# Altium PCB 前板.PcbDoc
Units mil, origin at the board's own origin, x right, y up, seen from the top; angles counter-clockwise.
Board outline 2362.2 x 2362.2 mil, 4 copper layers (Top Layer, GND, PWR, Bottom Layer), stack 23.756 mil thick; 58 components, 58 nets, 327 pads, 79 vias.
Unrouted connection lines stored in the file: 2.
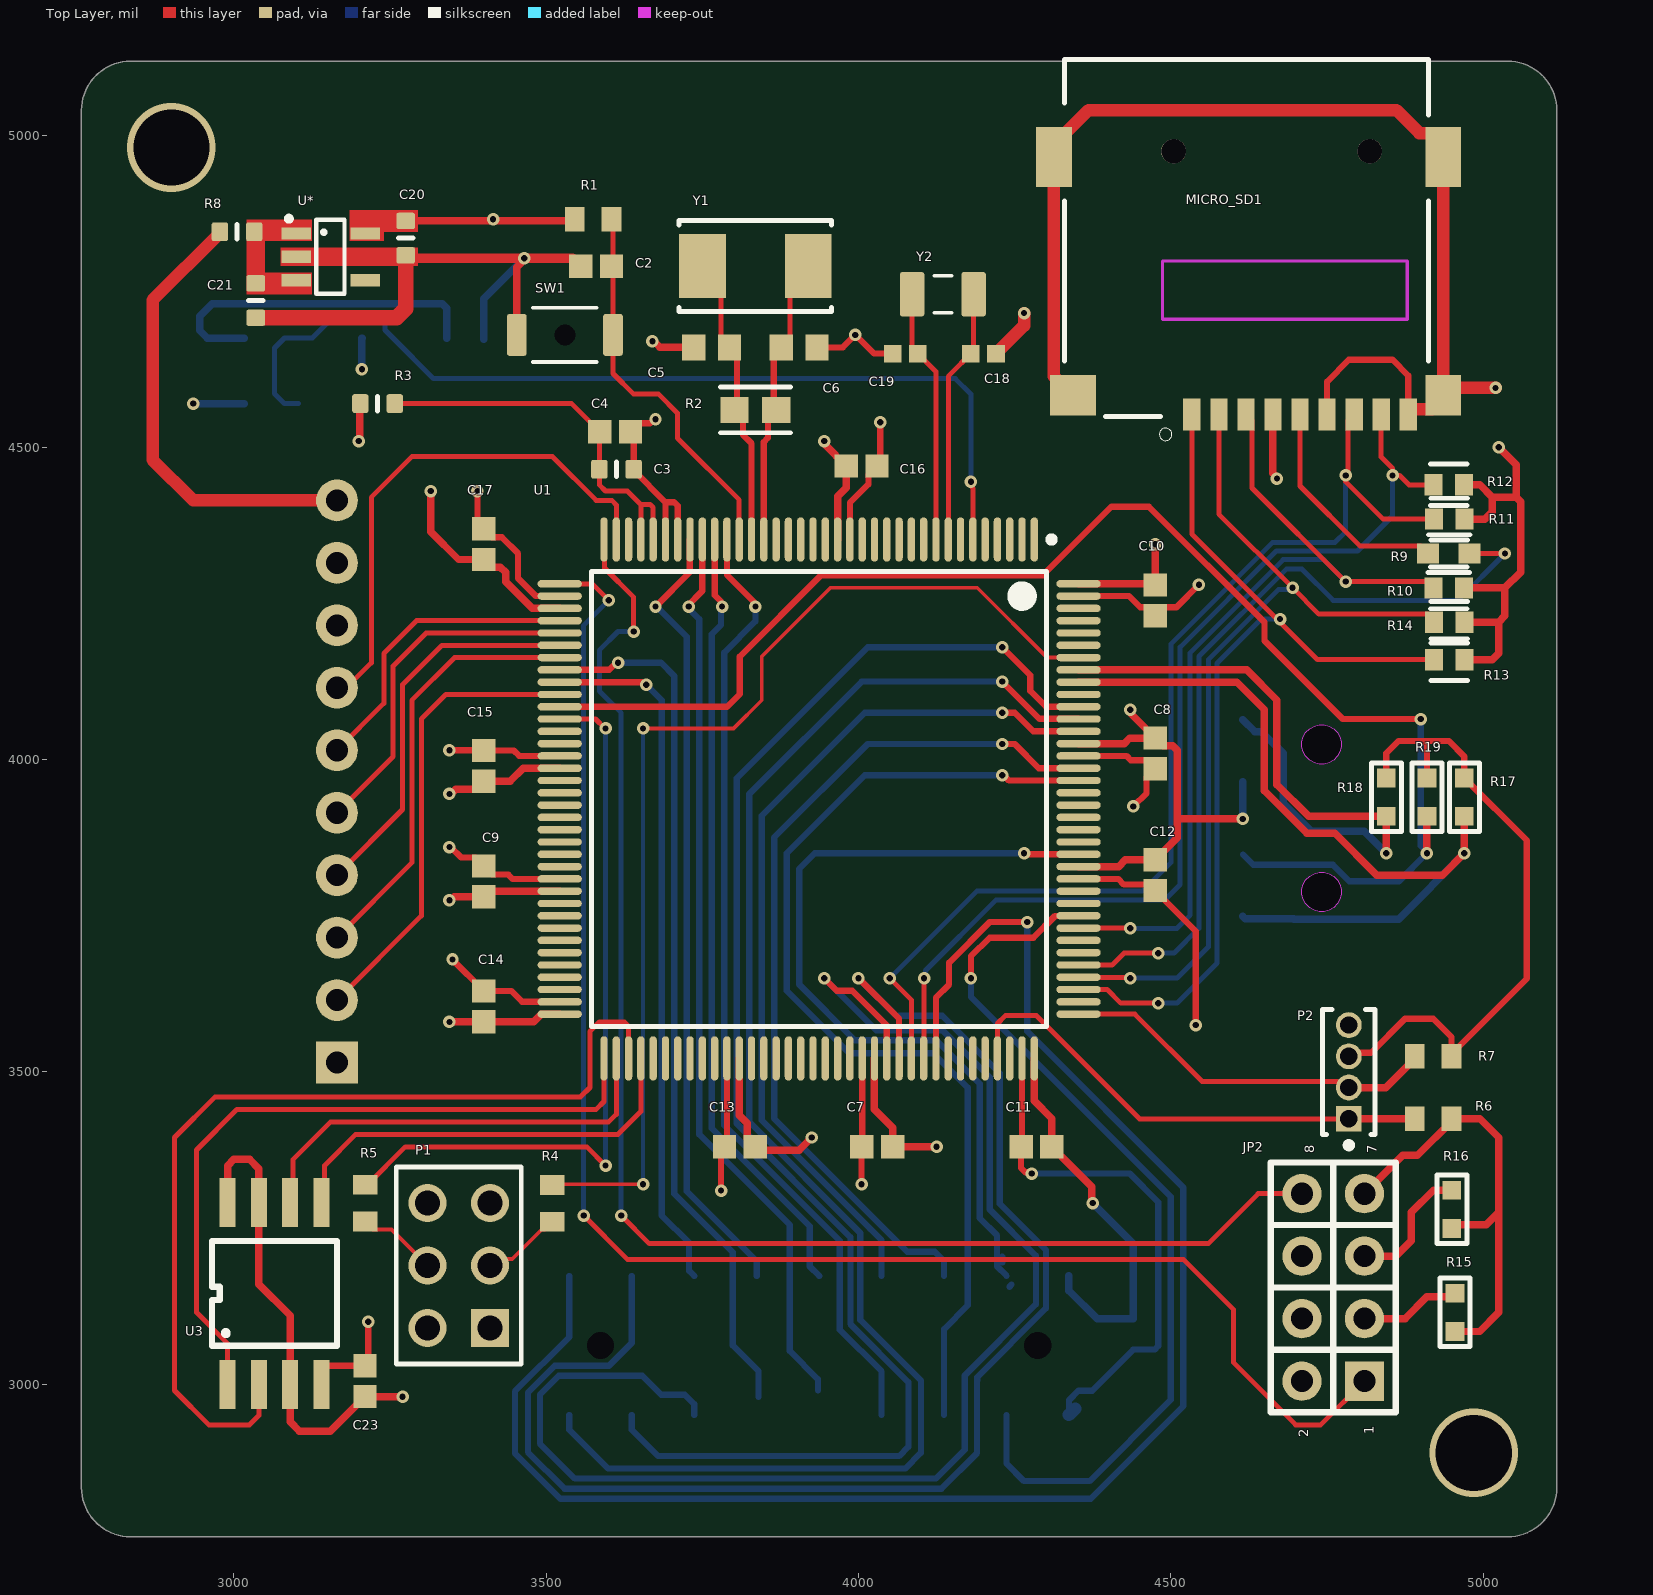
[diagram p0: Top Layer view]
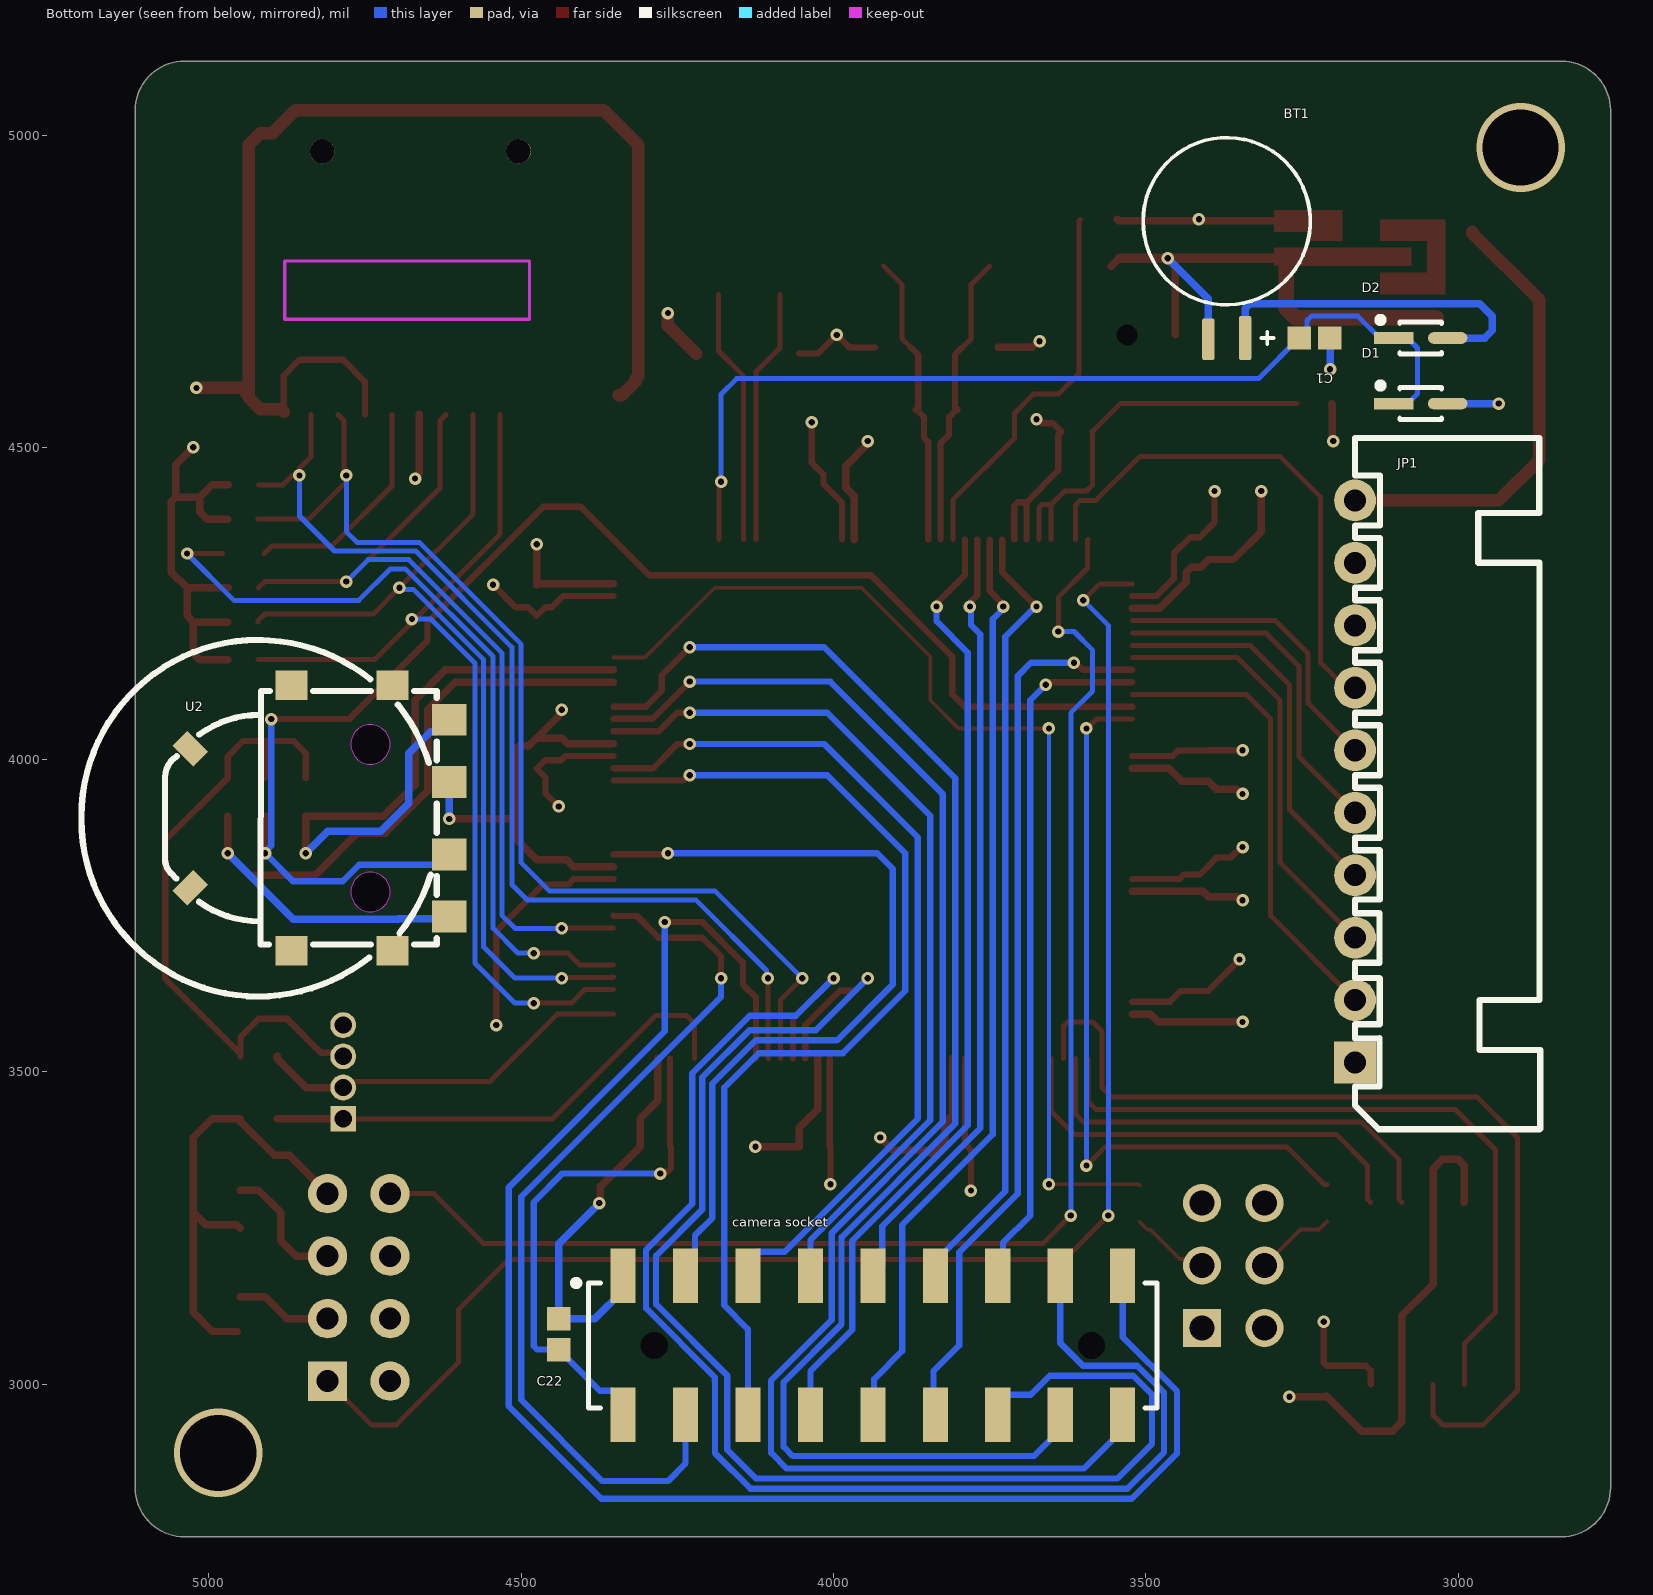
[diagram p1: Bottom Layer view, seen from below]
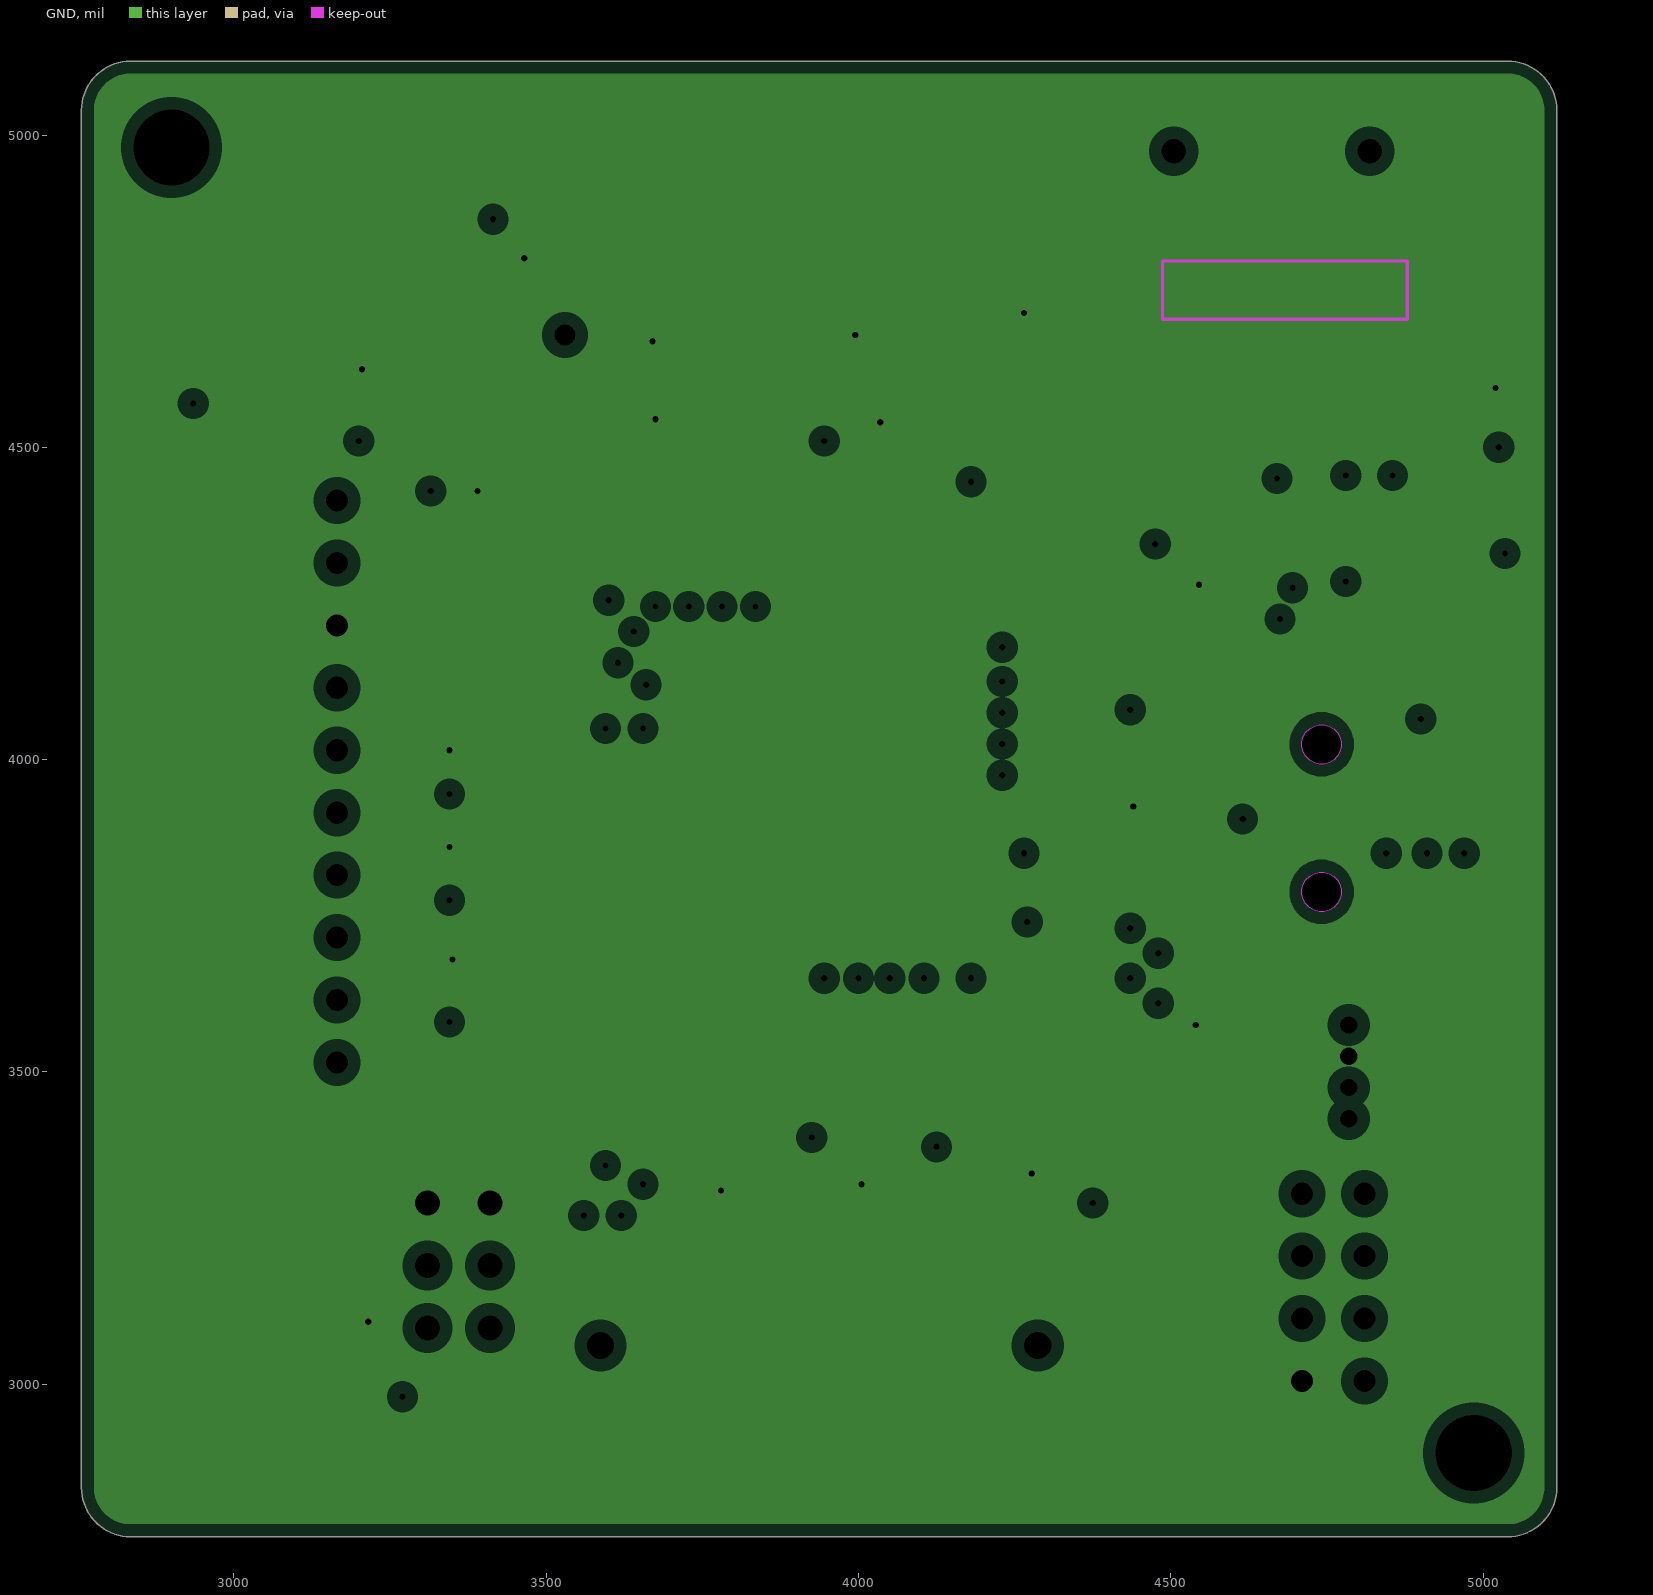
[diagram p2: GND, clearances drawn from the general rule]
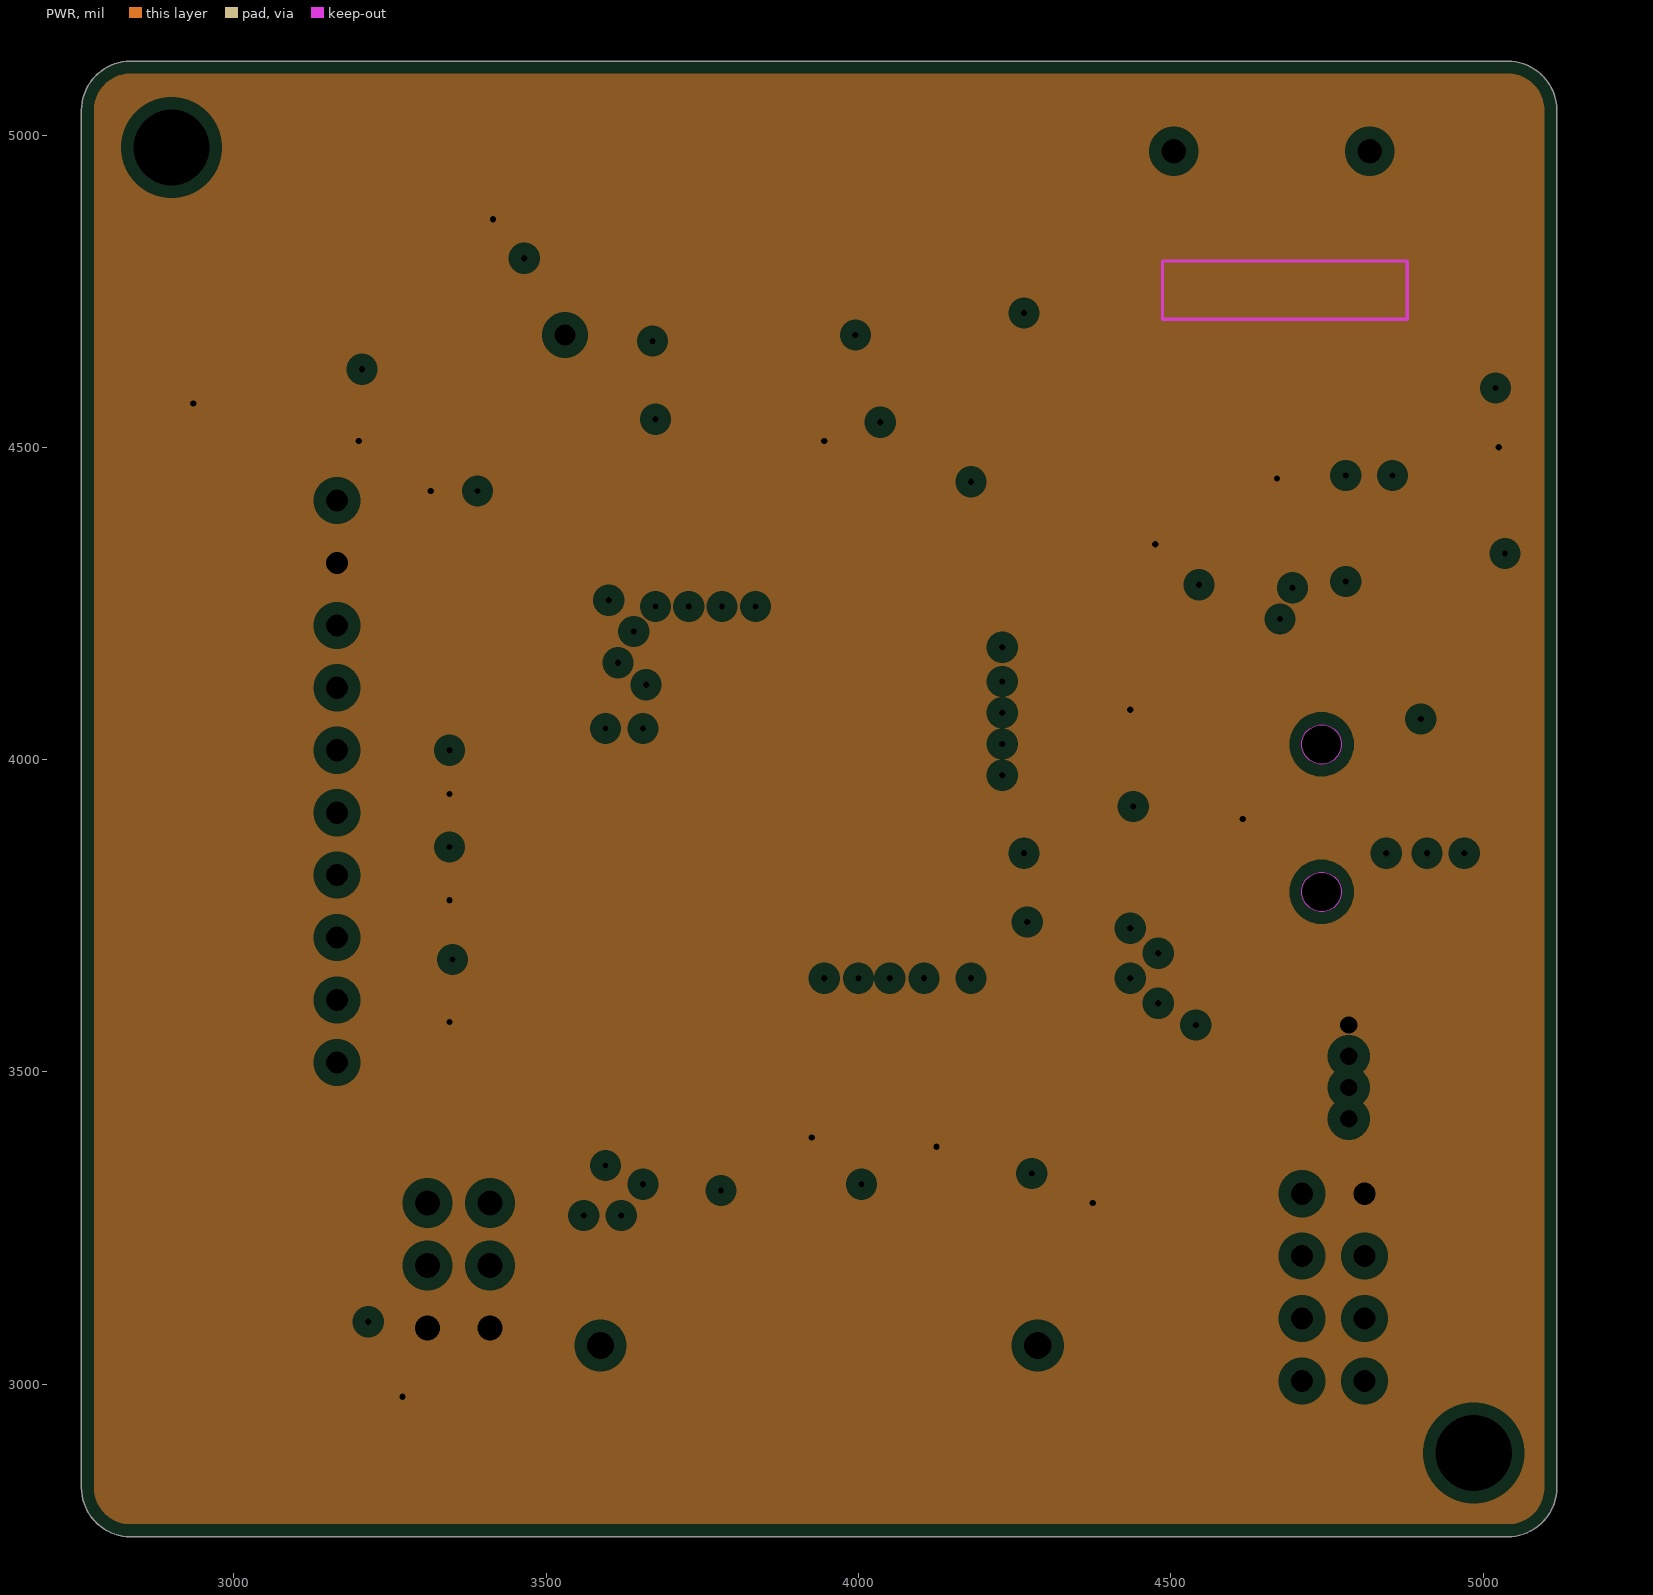
[diagram p3: PWR, clearances drawn from the general rule]

## Layer stack, top to bottom
Top Solder: solder mask 0.4, Solder Resist, Dk 3.5
Top Layer: signal copper 1.4
Dielectric 2: prepreg 2.8, PP-006, Dk 4.1
GND: plane copper 1.378, net GND
Dielectric 1: dielectric 12.6, FR-4, Dk 4.8
PWR: plane copper 1.378, net VCC
Dielectric 3: prepreg 2.8, PP-006, Dk 4.1
Bottom Layer: signal copper 1.4
Bottom Solder: solder mask 0.4, Solder Resist, Dk 3.5

## Board outline
2755.91,2834.65 2755.91,5039.37 cw(c2834.65,5039.37) 2834.65,5118.11 5039.37,5118.11 cw(c5039.37,5039.37) 5118.11,5039.37 5118.11,2834.65 cw(c5039.37,2834.65) 5039.37,2755.91 2834.65,2755.91 cw(c2834.65,2834.65)

## Design rules (kind name [scope] priority, off if disabled: settings)
Clearance Clearance_1 [InNetClass('pwr')] p1: gap=10 ignorepadtopadclearanceinfootprint=FALSE except(6: Arc-THPad Arc-Via Arc-Hole Track-THPad Track-Via Track-Hole SMDPad-SMDPad SMDPad-THPad SMDPad-Via SMDPad-Hole THPad-THPad THPad-Via THPad-Hole Via-Via Via-Hole Fill-Hole Poly-Hole Region-Hole Text-Hole)
Clearance [All] p2: gap=6 ignorepadtopadclearanceinfootprint=FALSE
DiffPairsRouting DiffPair_DiffPairsRouting [InDifferentialPair ('NewDifferentialPair2')] p1: maxlimit=10 minlimit=10 mostfreqgap=10 toplayer_minwidth=6 toplayer_maxwidth=15 toplayer_prefwidth=8 bottomlayer_minwidth=6 bottomlayer_maxwidth=15 bottomlayer_prefwidth=8 maxuncoupledlength=500
DiffPairsRouting DiffPair_DiffPairsRouting_1 [InDifferentialPair ('NewDifferentialPair1')] p2 off: maxlimit=10 minlimit=10 mostfreqgap=10 toplayer_minwidth=6 toplayer_maxwidth=15 toplayer_prefwidth=10 bottomlayer_minwidth=6 bottomlayer_maxwidth=15 bottomlayer_prefwidth=10 maxuncoupledlength=500
DiffPairsRouting [All] p3: maxlimit=10 minlimit=10 mostfreqgap=10 toplayer_minwidth=15 toplayer_maxwidth=15 toplayer_prefwidth=15 bottomlayer_minwidth=15 bottomlayer_maxwidth=15 bottomlayer_prefwidth=15 maxuncoupledlength=500
MatchedLengths DiffPair_MatchedLengths [InDifferentialPair ('NewDifferentialPair2')] p1: tolerance=1000 checknetsindiffpair=FALSE checkdiffpairvsdiffpair=TRUE checkxsignals=TRUE checkothers=TRUE
MatchedLengths DiffPair_MatchedLengths_1 [InDifferentialPair ('NewDifferentialPair1')] p2: tolerance=1000 checknetsindiffpair=FALSE checkdiffpairvsdiffpair=TRUE checkxsignals=TRUE checkothers=TRUE
PlaneClearance [All] p1: clearance=20
PlaneConnect [All] p1: planeconnectstyle=Relief reliefexpansion=20 reliefentries=4 reliefconductorwidth=10 reliefairgap=10
PolygonConnect [All] p1: connectstyle=Relief reliefconductorwidth=10 reliefentries=4 polygonreliefangle="90 Angle" airgapwidth=10
RoutingVias [All] p1: holewidth=10 width=20 viastyle="Through Hole" minholewidth=10 minwidth=20 maxholewidth=28 maxwidth=50
SolderMaskExpansion [All] p1: expansion=4 istentingtop=FALSE
Width pwr [InNetClass('pwr')] p1: maxlimit=50 minlimit=10 preferedwidth=25
Width [All] p2: maxlimit=500 minlimit=6 preferedwidth=15
27 further rules are at their usual default settings.

## Classes and differential pairs
pad class stm_pad: U1-1 U1-2 U1-3 U1-4 U1-5 U1-6 U1-7 U1-8 U1-9 U1-10 U1-11 U1-12 U1-13 U1-14 U1-15 U1-16 U1-17 U1-18 U1-19 U1-20 U1-21 U1-22 U1-23 U1-24 U1-25 U1-26 U1-27 U1-28 U1-29 U1-30 U1-31 U1-32 U1-33 U1-34 U1-35 U1-36 U1-37 U1-38 U1-39 U1-40 U1-41 U1-42 U1-43 U1-44 U1-45 U1-46 U1-47 U1-48 U1-49 U1-50 U1-51 U1-52 U1-53 U1-54 U1-55 U1-56 U1-57 U1-58 U1-59 U1-60 U1-61 U1-62 U1-63 U1-64 U1-65 U1-66 U1-67 U1-68 U1-69 U1-70 U1-71 U1-72 U1-73 U1-74 U1-75 U1-76 U1-77 U1-78 U1-79 U1-80 U1-81 U1-82 U1-83 U1-84 U1-85 U1-86 U1-87 U1-88 U1-89 U1-90 U1-91 U1-92 U1-93 U1-94 U1-95 U1-96 U1-97 U1-98 U1-99 U1-100 U1-101 U1-102 U1-103 U1-104 U1-105 U1-106 U1-107 U1-108 U1-109 U1-110 U1-111 U1-112 U1-113 U1-114 U1-115 U1-116 U1-117 U1-118 U1-119 U1-120 U1-121 U1-122 U1-123 U1-124 U1-125 U1-126 U1-127 U1-128 U1-129 U1-130 U1-131 U1-132 U1-133 U1-134 U1-135 U1-136 U1-137 U1-138 U1-139 U1-140 U1-141 U1-142 U1-143 U1-144

## Components (designator, comment, footprint, x,y, rotation, side; value= is the part's Value field where it differs from the comment)
BT1 "MS621FE-FL11E" SEIK-MS621FE-FL11E-2_V 3370.47,4862.01 r270 bottom
C1 "Capacitor 100 nF +/-10% 50 V 0603" CAPC1608X90X40NL10T20 3230,4675 r0 bottom value=100nF
C2 "Capacitor 100 nF +/-10% 50 V 0603" CAPC1608X90X40NL10T20 3580,4790 r0 top value=100nF
C3 "Capacitor 10µF +/-20% 10V 0603" CAPC0603(1608)100_L 3612.56,4465 r0 top value=10µF
C4 "Capacitor 100 nF +/-10% 50 V 0603" CAPC1608X90X40NL10T20 3610.39,4525 r0 top value=100nF
C5 "GRM1885C1H220JA01D" CAPC1608X90X35ML10T15 3765,4660 r0 top value=22pF
C6 "GRM1885C1H220JA01D" CAPC1608X90X35ML10T15 3905,4660 r180 top value=22pF
C7 "Capacitor 100 nF +/-10% 50 V 0603" CAPC1608X90X40NL10T20 4030,3380 r0 top value=100nF
C8 "Capacitor 100 nF +/-10% 50 V 0603" CAPC1608X90X40NL10T20 4475,4010 r90 top value=100nF
C9 "Capacitor 100 nF +/-10% 50 V 0603" CAPC1608X90X40NL10T20 3400,3805 r270 top value=100nF
C10 "Capacitor 100 nF +/-10% 50 V 0603" CAPC1608X90X40NL10T20 4475,4255 r90 top value=100nF
C11 "Capacitor 100 nF +/-10% 50 V 0603" CAPC1608X90X40NL10T20 4285,3380 r0 top value=100nF
C12 "Capacitor 100 nF +/-10% 50 V 0603" CAPC1608X90X40NL10T20 4475,3815 r90 top value=100nF
C13 "Capacitor 100 nF +/-10% 50 V 0603" CAPC1608X90X40NL10T20 3810,3380 r0 top value=100nF
C14 "Capacitor 100 nF +/-10% 50 V 0603" CAPC1608X90X40NL10T20 3400,3605 r270 top value=100nF
C15 "Capacitor 100 nF +/-10% 50 V 0603" CAPC1608X90X40NL10T20 3400,3990 r270 top value=100nF
C16 "Capacitor 100 nF +/-10% 50 V 0603" CAPC1608X90X40NL10T20 4005,4470 r180 top value=100nF
C17 "Capacitor 100 nF +/-10% 50 V 0603" CAPC1608X90X40NL10T20 3400,4345 r270 top value=100nF
C18 "Capacitor 10 pF +/- 5% 50 V 0402" CAPC1005X55X25ML05T05 4200,4650 r180 top value=10pF
C19 "Capacitor 10 pF +/- 5% 50 V 0402" CAPC1005X55X25ML05T05 4075,4650 r0 top value=10pF
C20 "Capacitor 10µF +/-20% 10V 0603" CAPC0603(1608)100_L 3275,4835 r90 top value=10µF
C21 "Capacitor 10µF +/-20% 10V 0603" CAPC0603(1608)100_L 3035,4735 r270 top value=10µF
C22 "Capacitor 100 nF +/-10% 50 V 0603" CAPC1608X90X40NL10T20 4440,3080 r270 bottom value=100nF
C23 "Capacitor 100 nF +/-10% 50 V 0603" CAPC1608X90X40NL10T20 3210,3005 r270 top value=100nF
"camera socket" "SSM-109-S-DV-A" SMTC-SSM-109-X-DV-A 3937.01,3062.13 r180 bottom
D1 "1N4148WS" FP-477AB-IPC_A 3060,4570 r180 bottom
D2 "1N4148WS" FP-477AB-IPC_A 3060,4675 r180 bottom
JP1 "10p" XH2.54-WI-10P 3165,3965 r90 bottom
JP2 "2.54排针排母 4X2" HDR2.54-LI-2x4P 4760,3155 r90 top
MICRO_SD1 "TF-01A" TF-01A 4621.49,4835.08 r180 top
P1 "TSW-103-08-T-D" SMTC-TSW-103-08-X-D 3410,3090 r90 top
P2 "GRPB041VWVN-RC" SLIN-GRPB041VWVN-RC_V 4785,3500 r90 top
R1 "Resistor 10k +/-1% 0603 100 mW" RESC1608X55X25ML10T15 3575,4865 r0 top value=10k
R2 "ERJ-3EKF1004V" FP-ERJ3EK-IPC_A 3835,4560 r0 top value=1M
R3 "ERJ3EKF10R0V" RESC0603(1608)_L 3230,4570 r180 top value=10
R4 "Resistor 10k +/-1% 0603 100 mW" RESC1608X55X25ML10T15 3510,3289.53 r270 top value=10k
R5 "Resistor 10k +/-1% 0603 100 mW" RESC1608X55X25ML10T15 3210,3290 r90 top value=10k
R6 "Resistor 10k +/-1% 0603 100 mW" RESC1608X55X25ML10T15 4920,3425 r0 top value=10k
R7 "Resistor 10k +/-1% 0603 100 mW" RESC1608X55X25ML10T15 4920,3525 r0 top value=10k
R8 "0R3J" RESC0603(1608)_L 3005,4845 r0 top value=0
R9 "RC0603JR-07100RL" FP-RC0603-0_55-MFG 4945,4330 r180 top value=100
R10 "CRCW060347K0FKEA" FP-CRCW0603-e3-IPC_C 4945,4275 r180 top value=47k
R11 "CRCW060347K0FKEA" FP-CRCW0603-e3-IPC_C 4945.77,4385 r180 top value=47k
R12 "CRCW060347K0FKEA" FP-CRCW0603-e3-IPC_C 4945,4440 r180 top value=47k
R13 "CRCW060347K0FKEA" FP-CRCW0603-e3-IPC_C 4945.77,4160 r180 top value=47k
R14 "CRCW060347K0FKEA" FP-CRCW0603-e3-IPC_C 4945.77,4220 r180 top value=47k
R15 "10k" "R 0603_L" 4955,3115 r90 top
R16 "10k" "R 0603_L" 4950,3280 r90 top
R17 "10k" "R 0603_L" 4970,3940 r270 top
R18 "10k" "R 0603_L" 4845,3940 r90 top
R19 "10k" "R 0603_L" 4910,3940 r270 top
SW1 "B3U-1000P-B" OMRON-B3U-1000P-2-B_V 3530,4680 r180 top
U1 "STM32F103ZET6" STM-LQFP144_N 3937.01,3937.01 r270 top
U2 "SIQ-02FVS3" SW-SMD_SIQ-02FVS3_1 4822.75,3906.35 r90 bottom
U3 "W25Q128FVSIG" SOIC-8_208mil 3070,3145 r90 top
U* "ME6211C33M5G-N" SOT23-5N 3155,4805 r270 top
Y1 "ABM7-8.000MHZ-D2Y-T" FP-ABM7-MFG 3835,4790 r0 top
Y2 "ABS07-166-32.768KHZ-T" EPSON-FC-135_V 4135,4745 r180 top

## Footprints (in the part's own frame and the unit in brackets; to place one, negate y for a bottom-side part, rotate by r counter-clockwise, add the part's x,y. Pads: shape width x height; smd on the part's side, far side on the other; paste and mask are expansions set on the pad)
CAPC0603(1608)100_L [mm] "Chip Capacitor, Body 1.6x0.8mm, Height 1.0mm, IPC High Density"
  rrect25% 0.66x0.76 smd: 1(-0.7,0) 2(0.7,0)
  silkscreen extent 0,-0.3 0,0.3, body extent -0.8,-0.4 0.8,0.4, height 0.95
CAPC1005X55X25ML05T05 [mm] "Chip Capacitor, 2-Leads, Body 1.05x0.55mm, IPC Low Density"
  rect 0.72x0.72 smd: 1(-0.51,0) 2(0.51,0)
  body extent -0.53,-0.28 0.53,0.28, height 0.55
CAPC1608X90X35ML10T15 [mm] "Chip Capacitor, 2-Leads, Body 1.7x0.9mm, IPC Low Density"
  rect 0.95x1.05 smd: 1(-0.725,0) 2(0.725,0)
  body extent -0.85,-0.45 0.85,0.45, height 0.9
CAPC1608X90X40NL10T20 [mm] "Chip Capacitor, 2-Leads, Body 1.70x0.90mm, IPC Medium Density"
  rect 0.95x0.95 smd: 1(-0.625,0) 2(0.625,0)
  body extent -0.85,-0.45 0.85,0.45, height 0.9
EPSON-FC-135_V [mm] "SMD, 2-Leads, Body 3.2x1.5mm"
  rrect20% 1x1.8 smd: 1(-1.25,0) 2(1.25,0)
  silkscreen extent -0.35,-0.75 0.35,0.75, body extent -1.6,-0.75 1.6,0.75, height 0.9
FP-477AB-IPC_A [mil]
  rect 63.21x18.6 smd paste+0 mask+0: 1(-43.32,0)
  rrect100% 63.21x18.6 smd paste+0 mask+0: 2(43.32,0)
  silkscreen extent -69,-26 33,34, body extent -49,-25 49,25, height 36
FP-ABM7-MFG [mm]
  rect 1.9x2.6 smd paste+0 mask+0: 1(-2.15,0) 2(2.15,0)
  silkscreen extent -3.1,-1.85 3.1,1.85, body extent -3.2,-1.95 3.2,1.95, height 0.25
FP-CRCW0603-e3-IPC_C [mil]
  rect 28.94x33.94 smd paste+0 mask+0: 1(-24.23,0) 2(24.23,0)
  silkscreen extent -30,-33 30,33, body extent -31,-17 31,17, height 20
FP-ERJ3EK-IPC_A [mil]
  rect 45.53x41.82 smd paste+0 mask+0: 1(-33.5,0) 2(33.5,0)
  silkscreen extent -56,-37 56,37, body extent -76,-41 76,41, height 10
FP-RC0603-0_55-MFG [mm]
  rect 0.9x0.8 smd paste+0 mask+0: 1(-0.85,0) 2(0.85,0)
  silkscreen extent -0.87,-0.76 0.85,0.77, body extent -0.8,-0.4 0.8,0.4, height 0.55
HDR2.54-LI-2x4P [mm] "双排排针，4x2脚"
  rect 1.6x1.6 hole 0.9: 1(-3.81,-1.27)
  round 1.6 hole 0.9: 2(-3.81,1.27) 3(-1.27,-1.27) 4(-1.27,1.27) 5(1.27,-1.27) 6(1.27,1.27) 7(3.81,-1.27) 8(3.81,1.27)
  silkscreen extent -5.08,-2.54 5.08,2.54, body extent -5.08,-2.54 5.08,2.54, height 8.5
OMRON-B3U-1000P-2-B_V [mm] "SMT, 2-Leads, Body 3x2.5mm"
  rrect25% 0.8x1.7 smd: 1(-1.954,0) 2(1.954,0)
  round 0 hole 0.85 unplated: H1(0,0)
  silkscreen extent -1.3,-1.1 1.3,1.1, body extent -2,-1.25 2,1.25, height 1.6
"R 0603_L" [mil] "1/10W贴片电阻"
  rect 30x30 smd: 1(-30.59,0) 2(30.59,0)
  silkscreen extent -55,-24 55,24, body extent -31,-16 32,16, height 16
RESC0603(1608)_L [mm] "Chip Resistor, Body 1.6x0.8mm, IPC High Density"
  rrect25% 0.66x0.76 smd: 1(-0.7,0) 2(0.7,0)
  silkscreen extent 0,-0.3 0,0.3, body extent -0.8,-0.4 0.8,0.4, height 0.45
RESC1608X55X25ML10T15 [mm] "Chip Resistor, 2-Leads, Body 1.70x0.90mm, IPC Low Density"
  rect 0.8x1 smd: 1(-0.75,0) 2(0.75,0)
  body extent -0.85,-0.45 0.85,0.45, height 0.55
SEIK-MS621FE-FL11E-2_V [mm] "SMD, 2-Leads, Diameter 6.8mm"
  rrect35% 1.8x0.5 smd: 1(4.75,0.75)
  rrect35% 1.7x0.5 smd: 2(4.8,-0.75)
  silkscreen extent -3.4,-3.4 5,3.4, body extent -3.4,-3.4 4.35,3.4, height 2.7
SLIN-GRPB041VWVN-RC_V [mm] "Header, 4-Leads, Body 5.08x2.14mm, Pitch 1.27mm"
  rect 1.05x1.05 hole 0.7: 1(-1.905,0)
  round 1.05 hole 0.7: 2(-0.635,0) 3(0.635,0) 4(1.905,0)
  silkscreen extent -3.1,-1.07 2.54,1.07, body extent -2.54,-1.07 2.54,1.07, height 4
SMTC-SSM-109-X-DV-A [mm] "C.L. Double Vertical SMT Socket Strip, 2x9 Pins, 2.54mm Pitch, Female"
  rect 1.02x2.22 smd: 1(-10.16,2.825) 2(-10.16,-2.825) 3(-7.62,2.825) 4(-7.62,-2.825) 5(-5.08,2.825) 6(-5.08,-2.825) 7(-2.54,2.825) 8(-2.54,-2.825) 9(0,2.825) 10(0,-2.825) 11(2.54,2.825) 12(2.54,-2.825) 13(5.08,2.825) 14(5.08,-2.825) 15(7.62,2.825) 16(7.62,-2.825) 17(10.16,2.825) 18(10.16,-2.825)
  round 0.8 hole 1.1 unplated: MH1(-8.89,0) MH2(8.89,0)
  silkscreen extent -12.19,-2.54 11.56,2.66, body extent -11.43,-3.52 11.43,3.52, height 7.42
SMTC-TSW-103-08-X-D [mm] ".025 SQ Post Terminal Strip Assembly, 2x3 Pins, Vertical, 2.54mm Pitch, Male"
  rect 1.55x1.55 hole 1.02: 1(0,0)
  round 1.55 hole 1.02: 2(0,2.54) 3(2.54,0) 4(2.54,2.54) 5(5.08,0) 6(5.08,2.54)
  silkscreen extent -1.46,-1.27 6.54,3.81, body extent -1.27,-1.27 6.35,3.81, height 8.38
SOIC-8_208mil [mm]
  rect 2x0.65 smd: 1(-3.688,2.032) 2(-3.688,0.762) 3(-3.688,-0.508) 4(-3.688,-1.778) 5(3.712,-1.778) 6(3.712,-0.508) 7(3.712,0.762) 8(3.712,2.032)
  silkscreen extent -2.12,-2.41 2.14,2.67, body extent -4.2,-2.56 4.2,2.82, height 2.3
SOT23-5N [mm] "3x1.6x1.1mm(长宽高)"
  rect 0.5x1.2 smd: 1(-0.95,-1.4) 2(0,-1.4) 3(0.95,-1.4) 4(0.95,1.4) 5(-0.95,1.4)
  silkscreen extent -1.63,-1.78 1.5,0.56, body extent -1.5,-1.4 1.5,1.4, height 1.15
STM-LQFP144_N [mm] "Thin QFP, 144-Leads, Body 20x20mm, Pitch 0.5mm, IPC Medium Density"
  oval 1.8x0.3 smd: 1(-10.55,8.75) 2(-10.55,8.25) 3(-10.55,7.75) 4(-10.55,7.25) 5(-10.55,6.75) 6(-10.55,6.25) 7(-10.55,5.75) 8(-10.55,5.25) 9(-10.55,4.75) 10(-10.55,4.25) 11(-10.55,3.75) 12(-10.55,3.25) 13(-10.55,2.75) 14(-10.55,2.25) 15(-10.55,1.75) 16(-10.55,1.25) 17(-10.55,0.75) 18(-10.55,0.25) 19(-10.55,-0.25) 20(-10.55,-0.75) 21(-10.55,-1.25) 22(-10.55,-1.75) 23(-10.55,-2.25) 24(-10.55,-2.75) 25(-10.55,-3.25) 26(-10.55,-3.75) 27(-10.55,-4.25) 28(-10.55,-4.75) 29(-10.55,-5.25) 30(-10.55,-5.75) 31(-10.55,-6.25) 32(-10.55,-6.75) 33(-10.55,-7.25) 34(-10.55,-7.75) 35(-10.55,-8.25) 36(-10.55,-8.75) 73(10.55,-8.75) 74(10.55,-8.25) 75(10.55,-7.75) 76(10.55,-7.25) 77(10.55,-6.75) 78(10.55,-6.25) 79(10.55,-5.75) 80(10.55,-5.25) 81(10.55,-4.75) 82(10.55,-4.25) 83(10.55,-3.75) 84(10.55,-3.25) 85(10.55,-2.75) 86(10.55,-2.25) 87(10.55,-1.75) 88(10.55,-1.25) 89(10.55,-0.75) 90(10.55,-0.25) 91(10.55,0.25) 92(10.55,0.75) 93(10.55,1.25) 94(10.55,1.75) 95(10.55,2.25) 96(10.55,2.75) 97(10.55,3.25) 98(10.55,3.75) 99(10.55,4.25) 100(10.55,4.75) 101(10.55,5.25) 102(10.55,5.75) 103(10.55,6.25) 104(10.55,6.75) 105(10.55,7.25) 106(10.55,7.75) 107(10.55,8.25) 108(10.55,8.75)
  oval 0.3x1.8 smd: 37(-8.75,-10.55) 38(-8.25,-10.55) 39(-7.75,-10.55) 40(-7.25,-10.55) 41(-6.75,-10.55) 42(-6.25,-10.55) 43(-5.75,-10.55) 44(-5.25,-10.55) 45(-4.75,-10.55) 46(-4.25,-10.55) 47(-3.75,-10.55) 48(-3.25,-10.55) 49(-2.75,-10.55) 50(-2.25,-10.55) 51(-1.75,-10.55) 52(-1.25,-10.55) 53(-0.75,-10.55) 54(-0.25,-10.55) 55(0.25,-10.55) 56(0.75,-10.55) 57(1.25,-10.55) 58(1.75,-10.55) 59(2.25,-10.55) 60(2.75,-10.55) 61(3.25,-10.55) 62(3.75,-10.55) 63(4.25,-10.55) 64(4.75,-10.55) 65(5.25,-10.55) 66(5.75,-10.55) 67(6.25,-10.55) 68(6.75,-10.55) 69(7.25,-10.55) 70(7.75,-10.55) 71(8.25,-10.55) 72(8.75,-10.55) 109(8.75,10.55) 110(8.25,10.55) 111(7.75,10.55) 112(7.25,10.55) 113(6.75,10.55) 114(6.25,10.55) 115(5.75,10.55) 116(5.25,10.55) 117(4.75,10.55) 118(4.25,10.55) 119(3.75,10.55) 120(3.25,10.55) 121(2.75,10.55) 122(2.25,10.55) 123(1.75,10.55) 124(1.25,10.55) 125(0.75,10.55) 126(0.25,10.55) 127(-0.25,10.55) 128(-0.75,10.55) 129(-1.25,10.55) 130(-1.75,10.55) 131(-2.25,10.55) 132(-2.75,10.55) 133(-3.25,10.55) 134(-3.75,10.55) 135(-4.25,10.55) 136(-4.75,10.55) 137(-5.25,10.55) 138(-5.75,10.55) 139(-6.25,10.55) 140(-6.75,10.55) 141(-7.25,10.55) 142(-7.75,10.55) 143(-8.25,10.55) 144(-8.75,10.55)
  silkscreen extent -10.67,-9.25 9.25,9.58, body extent -10,-10 10,10, height 1.6
SW-SMD_SIQ-02FVS3_1 [mm]
  rect 1.2x1.3 smd paste+0 mask+0.05: 1(5.4,-2.964) 2(5.4,1.136) 5(-5.4,1.136) 6(-5.4,-2.964)
  rect 0.85x1.2 smd rot 135 paste+0 mask+0.05: 3(2.828,5.264)
  rect 0.85x1.2 smd rot 45 paste+0 mask+0.05: 4(-2.828,5.264)
  rect 1.3x1.4 smd paste+0 mask+0.05: A(-4,-5.264) B(4,-5.264) C(1.475,-5.264) S(-1.475,-5.264)
  Keep-Out Layer board cut-out: 3.8,-2.064 3.8,-1.959 3.745,-1.755 3.64,-1.573 3.491,-1.424 3.309,-1.319 3.105,-1.264 2.895,-1.264 2.691,-1.319 2.509,-1.424 2.36,-1.573 2.255,-1.755 2.2,-1.959 2.2,-2.064 2.2,-2.17 2.255,-2.373 2.36,-2.555 2.509,-2.704 2.691,-2.81 2.895,-2.864 3.105,-2.864 3.309,-2.81 3.491,-2.704 3.64,-2.555 3.745,-2.373 3.8,-2.17 3.8,-2.064 3.8,-2.064
  Keep-Out Layer board cut-out: -2.2,-2.064 -2.2,-1.959 -2.255,-1.755 -2.36,-1.573 -2.509,-1.424 -2.691,-1.319 -2.895,-1.264 -3.105,-1.264 -3.309,-1.319 -3.491,-1.424 -3.64,-1.573 -3.745,-1.755 -3.8,-1.959 -3.8,-2.064 -3.8,-2.17 -3.745,-2.373 -3.64,-2.555 -3.491,-2.704 -3.309,-2.81 -3.105,-2.864 -2.895,-2.864 -2.691,-2.81 -2.509,-2.704 -2.36,-2.555 -2.255,-2.373 -2.2,-2.17 -2.2,-2.064 -2.2,-2.064
  silkscreen extent -7.25,-4.76 7.25,9.69
TF-01A [mm]
  rect 0.7x1.3 smd: 1(2.23,7.174) 2(1.13,7.174) 3(0.03,7.174) 4(-1.07,7.174) 5(-2.17,7.174) 6(-3.27,7.174) 7(-4.37,7.174) 8(-5.47,7.174) CD1(-6.57,7.174)
  rect 1.448x1.651 smd: MP1(-7.989,6.4)
  rect 1.448x2.438 smd: MP2(-7.989,-3.3) MP3(7.836,-3.3)
  rect 1.854x1.651 smd: MP4(7.061,6.4)
  round 1 hole 1 unplated: ""(-5.004,-3.531) ""(2.972,-3.531)
  Keep-Out Layer lines w0.127: 3.429,3.302 3.429,0.94 -6.528,0.94 -6.528,3.302 3.429,3.302
  silkscreen extent -7.4,-7.26 7.4,8.24, body extent -8.05,-7.54 8.05,7.66, height 2
XH2.54-WI-10P [mm] "接插件，10P"
  rect 1.7x1.7 hole 0.9: 1(-11.43,0)
  round 1.7 hole 0.9: 2(-8.89,0) 3(-6.35,0) 4(-3.81,0) 5(-1.27,0) 6(1.27,0) 7(3.81,0) 8(6.35,0) 9(8.89,0) 10(11.43,0)
  silkscreen extent -14.15,-7.53 13.97,0, body extent -13.93,-7.35 13.93,0.35, height 5.73

## Part data
BT1: library part CMP-00029-00000-1, "MS Lihium Rechargeable Battery, 3 V, -20 to 60 degC, Tray", Mounting Technology=WithLeads, Pins=2, RoHS Compliant=NotApplicable
C1 C2 C4 C7 C8 C9 C10 C11 C12 C13 C14 C15 C16 C17 C22 C23: library part CMP-001-00017-6, "Chip Capacitor, 100 nF, +/- 10%, 50 V, 0603 (1608 Metric)", Capacitor Type=Ceramic, Case/Package=0603, Max Operating Temperature=125°C, Min Operating Temperature=-55°C, Tolerance=10%, Voltage Rating=50V, Mounting Technology=SM, Pins=2, RoHS Compliant=True
C3 C20 C21: library part CMP-001-00075-4, "Chip Capacitor, 10µF +/-20%, 10V, 0603, Thickness 1 mm", Case/Package=0603, Max Operating Temperature=85°C, Min Operating Temperature=-55°C, Tolerance=10%, Voltage Rating=10V, Mounting Technology=SMT, Pins=2
C5 C6: library part CMP-001-00089-1, "CAP CER 22PF 50V C0G/NP0 0603", Case/Package=0603, Max Operating Temperature=125°C, Min Operating Temperature=-55°C, Tolerance=10%, Voltage Rating=50V, Mounting Technology="Surface Mount", Pins=2, RoHS Compliant=Yes
C18 C19: library part CMP-001-00013-6, "Chip Capacitor, 10 pF, +/- 5%, 50 V, 0402 (1005 Metric)", Capacitor Type=Ceramic, Case/Package=0402, Max Operating Temperature=125°C, Min Operating Temperature=-55°C, Tolerance=5%, Voltage Rating=50V, Mounting Technology=SM, Pins=2, RoHS Compliant=True
"camera socket": library part CMP-00012-1, "Headers & Wire Housings Surface Mount PCB Socket Strips, 0.100 pitch"
D1 D2: library part CMP-004-00033-1, "Diode Ultra Fast Recovery Rectifier 75V 0.15A 2-Pin SOD-323F T/R", Forward Current=150mA, Forward Voltage=1V, Max Operating Temperature=150°C, Min Operating Temperature=-55°C, Mounting Technology="Surface Mount", Pins=2, RoHS Compliant=Yes
JP1: library part CMP-069-000000-1, Component Type=Standard, Design Item ID=10p, Pin Count=10, Source=线对板线对线连接器.SchLib
JP2: library part CMP-002-00115-2, "4*2P接插件", BOM名称=4*2P接插件, Design Item ID="Header 4X2", Source="4.6   - 接插件-脚距2.54.SchLib"
MICRO_SD1: library part CMP-041-000000-2, "Standard Card Edge Connectors", Package=Package, Availability="Not in stock", Check_prices=https://www.snapeda.com/parts/TF-01A/HRO+Electronics+Co.%252C+Ltd./view-part/?ref=eda, Component Type=Standard, Design Item ID=TF-01A, MF="HRO Electronics Co., Ltd.", MP=TF-01A, Pin Count=13, Price=None, SnapEDA_Link=https://www.snapeda.com/parts/TF-01A/HRO+Electronics+Co.%252C+Ltd./view-part/?ref=snap, Source=TF-01A.SchLib
P1: library part CMP-00008-1, "Headers & Wire Housings Classic PCB Header Strips, 0.100 pitch"
P2: library part CMP-00010-1, "Male, 4 C, Straight, .050\" CC; 3.00mm Head/2.30mm Tail, No Mt; Nylon 9T, Brass, 105 C"
R1 R4 R5 R6 R7: library part CMP-009-00017-5, "Chip Resistor, 10 KOhm, +/- 1%, 01 W, -55 to 155 degC, 0603 (1608 Metric)", Case/Package=0603, Max Operating Temperature=155°C, Min Operating Temperature=-55°C, Power=100mW, Tolerance=1%, Voltage Rating=50V, Mounting Technology=SM, Pins=2, RoHS Compliant=True
R2: library part CMP-009-00178-1, "Res Thick Film 0603 1M Ohm 1% 1/10W ±100ppm/°C Molded SMD Punched Carrier T/R", Case/Package=0603, Max Operating Temperature=155°C, Min Operating Temperature=-55°C, Tolerance=1%, Voltage Rating=75V, Mounting Technology="Surface Mount", Pins=2, RoHS Compliant=Yes
R3: library part CMP-009-00179-1, "Res Thick Film 0603 10 Ohm 1% 0.1W(1/10W) +/-100ppm/C Molded SMD Automotive Punched T/R", Case/Package=0603, Max Operating Temperature=155°C, Min Operating Temperature=-55°C, Tolerance=1%, Voltage Rating=75V, Mounting Technology="Surface Mount", Pins=2, RoHS Compliant=Yes
R8: library part CMP-009-00063-2, "Jumper 0603 (1608 Metric)", Case/Package=0603, Mounting Technology=SMT, Pins=2
R9: library part CMP-009-00182-1, "Res Thick Film 0603 100 Ohm 5% 1/10W ±100ppm/°C Molded SMD SMD Paper T/R", Case/Package=0603, Max Operating Temperature=155°C, Min Operating Temperature=-55°C, Tolerance=5%, Voltage Rating=50V, Pins=2, RoHS Compliant=Yes
R10 R11 R12 R13 R14: library part CMP-009-00184-1, "SMD Chip Resistor, 47 kOhm, ± 1%, 100 mW, 0603 [1608 Metric], Thick Film, General Purpose", Case/Package=0603, Max Operating Temperature=155°C, Min Operating Temperature=-55°C, Tolerance=1%, Voltage Rating=75V, Mounting Technology="Surface Mount", RoHS Compliant=Yes
R15 R16 R17 R18 R19: library part CMP-009-00185-1, "贴片电阻", BOM名称=贴片电阻, Component Type=Standard, Design Item ID=R, Source="3.1   - 电阻-电容-电感.SchLib"
SW1: library part CMP-011-00011-4, "Ultra-small Surface-mounting Tactile Switches with High Contact Reliability, SPST-NO, -25 to 70 degC, 2-Pin SMD, RoHS, Tape and Reel", Current Rating=50mA, Voltage Rating=12V, Pins=2, RoHS Compliant=Details
U1: library part CMP-020-00025-1, "MCU 32-bit STM32F1 ARM Cortex M3 RISC 512KB Flash 2.5V/3.3V 144-Pin LQFP Tray", Case/Package=LQFP, Clock Frequency=72MHz, Max Operating Temperature=85°C, Max Supply Voltage=3.6V, Min Operating Temperature=-40°C, Min Supply Voltage=2V, Frequency=72MHz, Interface=I2C,SPI,USB,CAN,IrDA,UART,USART,LIN,I2S,SDIO, Pins=144, RAM Size=64KB, RoHS Compliant=Yes
U2: library part CMP-043-000000-1, JLCPCB Part Class="Extended Part", LCSC Part Name=拨轮滚轮旋转编码器开关, Manufacturer=MITSUMI(美上美), Add into BOM=yes, Component Type=Standard, Convert to PCB=yes, Datasheet=https://atta.szlcsc.com/upload/public/pdf/source/20220728/2FBC1A98A06DC86460FC69DAE20456FC.pdf, Design Item ID=SIQ-02FVS3, Device=SIQ-02FVS3, Manufacturer Part=SIQ-02FVS3, Pin Count=10, Source=Schlib1.SchLib, Supplier Footprint=SMD, Supplier Part=C2925423
U3: library part CMP-019-00053-2, "IC FLASH 128MBIT 104MHZ 8SOIC", Case/Package=SOIC, Frequency=104MHz, Max Operating Temperature=85°C, Max Supply Voltage=3.6V, Min Operating Temperature=-40°C, Min Supply Voltage=2.7V, Memory Format=Non-Volatile,FLASH,NOR, Memory Size=16777216, Mounting Technology="Surface Mount", Pins=8, RoHS Compliant=Yes
U*: library part CMP-019-00052-1, "VIN=6.5V Vo=3.3V Io=600mA"
Y1: library part CMP-003-00030-1, "Crystal 8MHz ±20ppm (Tol) ±30ppm (Stability) 18pF FUND 100Ohm 2-Pin Mini-CSMD T/R", Case/Package=CSMD, Frequency=8MHz, Load Capacitance=18pF, Max Operating Temperature=85°C, Min Operating Temperature=-40°C, ESR=80, Mounting Technology="Surface Mount", Pins=2
Y2: library part CMP-003-00029-1, "Crystal 32.768kHz 10ppm 7pF -40C +85C", Frequency=32.768kHz, Pins=2

## Via types
v1: diameter 20, hole 10, Top Layer to Bottom Layer, 77 vias
v2: diameter 141.73, hole 122.05, Top Layer to Bottom Layer, 2 vias

## Nets (pads, with @x,y where several pads share a name; then routed paths per layer and width w, separated by ;. In a path a pad name is that pad's centre, name@x,y a point inside that pad or via, vN(x,y) a via of type N, cw(c..) or ccw(c..) an arc to the next point about the centre after c; other vN are vias at no path point)
4v7in: JP1.10 R8.1 | length 731.4
  Top Layer w20: R8.1 2977.44,4843.04 2870,4735.6 2870,4480 2935,4415 JP1.10
BOOT0: R4.1 U1.138 | length 1753.2
  Top Layer w6: R4.1 3510.94,3320 v1(3655,3320) ; v1(3655,4050) 3800,4050 3845,4095 3845,4165 3955,4275 4190,4275 4301.61,4163.39 U1.138
  Bottom Layer w6: v1(3655,3320) v1(3655,4050)
BOOT1: R5.2 U1.48 | length 1202.1
  Top Layer w8: R5.2 3213.94,3319.53 3274.41,3380 3565,3380 v1(3595,3350) ; U1.48 U1.48 3578.89,4065 3593.89,4050 v1(3595,4050)
  Bottom Layer w8: v1(3595,3350) v1(3595,4050)
ENCODER_A: R17.2 U1.136 U2.A | length 1295.5
  Top Layer w12: U1.136 4605.98,4124.02 4650,4080 4650,3950 4717.5,3882.5 4762.5,3882.5 4830,3815 4935,3815 v1(4970,3850) R17.2
  Bottom Layer w12: U2.A 4619.37,3745 4696.63,3745 4696.89,3744.74 4864.74,3744.74 v1(4970,3850)
ENCODER_B: R18.1 U1.137 U2.B | length 1093.1
  Top Layer w12: U1.137 4621.3,4143.7 4670,4095 4670,3960 4720.59,3909.41 R18.1 v1(4845,3850)
  Bottom Layer w12: U2.B 4634.33,4045 4645,4045 4680,4010 4680,3930 4725,3885 4810,3885 v1(4845,3850)
ENCODER_S: R19.2 U1.47 U2.S | length 2313.9
  Top Layer w10: U1.47 3789.65,4084.65 3810,4105 3810,4165 3940,4295 4295,4295 4405,4405 4465,4405 4650,4220 4650,4190 4775,4065 v1(4900,4065)
  Top Layer w12: v1(4910,3850) R19.2
  Bottom Layer w10: U2.S 4632.04,3831.74 4759.5,3831.74 4785.86,3805.37 4865.37,3805.37 v1(4910,3850) 4910,3852.16 4900,3862.16 v1(4900,4065)
FLASH_CS: U1.73 U3.1 | length 1149.7
  Top Layer w8: U3.1 2990,3065 2940,3115 2940,3375 3005,3440 3580,3440 3592.52,3452.52 U1.73
FLASH_MISO: U1.75 U3.2 | length 1529.3
  Top Layer w8: U3.2 3040,2950 3025,2935 2960,2935 2905,2990 2905,3395 2970,3460 3555,3460 3570,3475 3570,3565 3585,3580 3625,3580 3631.89,3573.11 U1.75
FLASH_MOSI: U1.76 U3.5 | length 688.5
  Top Layer w8: U3.5 3145,3296.13 3145,3350 3195,3400 3615,3400 3651.57,3436.57 U1.76
FLASH_SCK: U1.74 U3.6 | length 707.5
  Top Layer w8: U3.6 3095,3296.13 3095,3360 3155,3420 3600,3420 3612.2,3432.2 U1.74
GND: "camera socket.2" BT1.2 C1.1 C2.1 C3.2 C4.2 C5.1 C6.1 C7.1 C8.1 C9.1 C10.1 C11.1 C12.1 C13.1 C14.1 C15.1 C16.1 C17.1 C18.1 C19.1 C20.1 C21.2 C22.2 C23.1 JP1.8 JP2.2 MICRO_SD1.6 MICRO_SD1.CD1 MICRO_SD1.MP1 MICRO_SD1.MP2 MICRO_SD1.MP3 MICRO_SD1.MP4 P1.5 P1.6 P2.3 R7.2 R17.1 R18.2 R19.1 SW1.2 U1.16 U1.30 U1.31 U1.38 U1.51 U1.61 U1.71 U1.83 U1.94 U1.107 U1.120 U1.130 U1.143 U3.4 U*.2 | length 7820.2
  Top Layer w10: U3.4 3140,3021.81 3147.8,3029.61 C23.1 3215,3034.61 v1(3215,3100) ; v1(3345,3860) 3346.97,3860 3363.66,3843.31 3386.3,3843.31 C9.1 3413.7,3815.91 3439.09,3815.91 3445.94,3809.06 U1.61 ; v1(3345,4015) 3399.61,4015 C15.1 3448.32,4014.61 3457.02,4005.91 U1.51 ; v1(3350,3680) 3350,3679.61 C14.1 3443.97,3629.61 3461.37,3612.2 U1.71 ; v1(3390,4430) 3390,4379.61 3413.7,4355.91 3429.09,4355.91 3455,4330 3455,4290 3482.84,4262.16 3521.31,4262.16 U1.38 ; v1(3675,4545) 3672.29,4545 3665.99,4538.7 3648.7,4538.7 C4.2 3640.12,4519.88 C3.2 3640.12,4463.04 3690.95,4412.21 ; U1.31 3690.95,4412.21 ; U1.30 3710.63,4406.35 3704.77,4412.21 3690.95,4412.21 ; v1(3780,3310) 3780,3374.61 C13.1 3789.37,3383.98 U1.83 ; C6.1 3975,4660 v1(3995,4680) 4025,4650 C19.1 ; U1.16 3986.22,4411.22 4015.91,4440.91 4015.91,4456.3 C16.1 4035,4475.39 v1(4035,4540) ; v1(4005,3320) 4005,3379.61 C7.1 4005.91,3380.51 U1.94 ; U1.107 4261.81,3381.42 4260,3379.61 4260,3346.53 4267.27,3339.26 4275.44,3339.26 v1(4277.35,3337.35) ; U1.120 4415.94,3809.06 4425,3800 4465.39,3800 4540,3725.39 v1(4540,3575) ; U1.130 4429.09,4005.91 4435.91,3999.09 4461.3,3999.09 C8.1 4461.3,3971.69 4461.3,3946.3 v1(4440,3925) ; U1.143 4433.19,4261.81 4450.91,4244.09 4461.3,4244.09 C10.1 4488.7,4244.09 4509.09,4244.09 v1(4545,4280) ; MICRO_SD1.6 4750.24,4605.24 4785,4640 4855,4640 4880.16,4614.84 MICRO_SD1.CD1@4880.16,4556.83 ; P2.3 4790.67,3530.67 4820.67,3530.67 4875,3585 4920,3585 4949.53,3555.47 R7.2@4949.53,3528.94 ; R18.2 4845,4010 4865,4030 4905,4030 ; R19.1 4910,4025 4905,4030 ; R7.2 R7.2@4949.53,3528.94 ; 4905,4030 4945,4030 4970,4005 R17.1 5070,3870.59 5070,3649.41 R7.2@4949.53,3528.94
  Top Layer w12: C20.1 C20.1@3279.74,4802.7 ; SW1.2 3453.07,4788.61 3465,4800.54 v1(3465,4802.7) ; C2.1@3542.69,4802.7 C2.1 ; v1(3670,4670) 3672.16,4670 3682.16,4660 C5.1
  Top Layer w15: C20.1@3279.74,4802.7 v1(3465,4802.7) C2.1@3542.69,4802.7
  Top Layer w20: C18.1 4265,4694.92 v1(4265,4715) ; MICRO_SD1.MP4 4339.49,4583.11 4316.99,4605.61 4316.99,4609.61 4312.98,4613.62 MICRO_SD1.MP3 4312.98,4984.5 4368.48,5040 4861,5040 4898,5003 4917.5,5003 4936,4984.5 MICRO_SD1.MP2 MICRO_SD1.MP1 ; MICRO_SD1.CD1@4880.16,4556.83 4883.94,4560.61 4917.5,4560.61 4936,4579.11 MICRO_SD1.MP1 ; v1(5020,4595) 4947.89,4595 MICRO_SD1.MP1
  Top Layer w25: C21.2 3260.36,4707.44 3275,4722.09 C20.1
  Bottom Layer w10: v1(4277.35,3337.35) 4434.14,3337.35 4480,3291.49 4480,3061.25 4474.14,3055.39 C22.2 4374.21,2989.61 4352.09,2989.61 4337.01,2974.53 4337.01,2950.91
  Bottom Layer w12: v1(3205,4625) 3205,4674.61 C1.1 ; BT1.2 3400,4737.7 v1(3465,4802.7)
  Bottom Layer w20: 4337.01,2950.91 4347.09,2960.98
LCD_BLK: JP1.6 U1.40 | length 489.4
  Top Layer w8: JP1.6 3240,4090 3240,4170 3292.44,4222.44 U1.40
LCD_CS: JP1.2 U1.46 | length 743.9
  Top Layer w8: JP1.2 3300,3750 3300,4065 3339.33,4104.33 U1.46
LCD_DC: JP1.4 U1.42 | length 626.3
  Top Layer w8: JP1.4 3270,3920 3270,4120 3333.07,4183.07 U1.42
LCD_MOSI: JP1.3 U1.43 | length 694.7
  Top Layer w8: JP1.3 3285,3835 3285,4095 3353.39,4163.39 U1.43
LCD_RES: JP1.7 U1.35 | length 843.4
  Top Layer w8: JP1.7 3180,4115 3220,4155 3220,4420 3285,4485 3510,4485 3580,4415 3605,4415 3612.55,4407.45 3612.55,4352.71 U1.35
LCD_SCK: JP1.5 U1.41 | length 560.8
  Top Layer w8: JP1.5 3255,4005 3255,4150 3307.76,4202.76 U1.41
NetBT1_1: BT1.1 D2.2 | length 554.7
  Bottom Layer w12: D2.2 2957.03,4675 2945,4687.03 2945,4710 2965,4730 3333.92,4730 3340.94,4722.97 BT1.1
NetC1_2: C1.2 D1.1 D2.1 U1.6 | length 1548.8
  Top Layer w8: v1(4180,4445) 4182.3,4442.7 4182.3,4435.09 4183.07,4434.31 U1.6
  Bottom Layer w8: D1.1 3081.01,4570 3065,4586.01 3065,4658.99 3081.01,4675 D2.1 3125.62,4675 3160.62,4710 3235,4710 3241.91,4703.09 3241.91,4687.7 C1.2 3319.61,4610 4155,4610 4180,4585 v1(4180,4445)
NetC5_2: C5.2 R2.1 U1.24 Y1.1 | length 472.7
  Top Layer w8: Y1.1 3780,4760.35 3780,4673.54 C5.2
  Top Layer w10: C5.2 3805.6,4647.94 3805.6,4564.1 R2.1 ; R2.1@3803.36,4560 3815,4548.36 3815,4520 3828.74,4506.26 U1.24
NetC6_2: C6.2 R2.2 U1.23 Y1.2 | length 470.9
  Top Layer w8: C6.2 3890,4673.54 3890,4760.35 Y1.2
  Top Layer w10: U1.23 3848.43,4508.43 3855,4515 3855,4548.36 R2.2@3866.64,4560 ; R2.2 R2.2@3866.64,4560 ; C6.2 3864.4,4647.94 3864.4,4562.24 R2.2@3866.64,4560
NetC18_2: C18.2 U1.8 Y2.1 | length 409.4
  Top Layer w8: U1.8 4143.7,4613.78 4184.21,4654.29 Y2.1
NetC19_2: C19.2 U1.9 Y2.2 | length 408.5
  Top Layer w8: Y2.2 4085.79,4659.29 4124.02,4621.06 U1.9
NetC21_1: C21.1 R8.2 U*.1 U*.3 | length 17.5
  Top Layer w15: U*.1@3083.5,4845 3086.1,4842.4 U*.1
NetJP2_3: JP2.3 R15.2 | length 154.5
  Top Layer w12: JP2.3 4820,3105 4875,3105 4910,3140 R15.2@4950,3140
NetJP2_5: JP2.5 R16.2 | length 210.1
  Top Layer w12: JP2.5 4860,3205 4885,3230 4885,3275 4920.59,3310.59 R16.2
NetMICRO_SD1_5: MICRO_SD1.5 R9.2 | length 363.9
  Top Layer w8: MICRO_SD1.5 4706.93,4438.07 4803.25,4341.75 4899.79,4341.75 R9.2
NetP1_3: P1.3 R4.2 | length 129
  Top Layer w6: P1.3 3420.53,3200.53 3445.53,3200.53 3492.25,3247.25 3497.25,3247.25 R4.2
NetP1_4: P1.4 R5.1 | length 129.2
  Top Layer w6: R5.1 3222.75,3247.72 3252.28,3247.72 P1.4
"OV D0 PC0": "camera socket.8" U1.26 | length 1545.5
  Top Layer w10: U1.26 3789.37,4295.63 v1@3835,4250
  Bottom Layer w10: v1@3835,4250 3835,4221.41 3785,4171.41 3785,3414.81 3970.09,3229.72 3970.09,3087.35 4037.01,3020.43 4037.01,2950.91
  other v1: 3835,4245
"OV D1 PC 1": "camera socket.9" U1.27 | length 1260.7
  Top Layer w10: U1.27 3769.69,4263.02 3780,4252.71 v1@3780,4250
  Bottom Layer w10: v1@3780,4250 3780,4215.74 3765,4200.74 3765,3410 3921.93,3253.07 3921.93,3188.43 3937.01,3173.35
  other v1: 3781.67,4245
"OV D2 PC2": "camera socket.10" U1.28 | length 1459.7
  Top Layer w10: v1@3725,4245 3750,4270 U1.28
  Bottom Layer w10: v1@3725,4245 3745,4225 3745,3400 3890,3255 3890,3053.31 3935,3008.31 3935,2990
  other v1: 3728.33,4245
"OV D3 PC3": "camera socket.11" U1.29 | length 1270.1
  Top Layer w10: v1(3675,4245) 3729.97,4299.97 3729.97,4352.02 U1.29
  Bottom Layer w10: v1(3675,4245) 3676.83,4245 3725,4196.83 3725,3308.98 3837.01,3196.97 3837.01,3173.35
"OV D4 PC4": "camera socket.12" U1.44 | length 1406.6
  Top Layer w10: U1.44 3600.99,4143.7 3612.29,4155 v1(3615,4155)
  Bottom Layer w10: v1(3615,4155) 3683.89,4155 3705,4133.89 3705,3305 3798.85,3211.15 3798.85,3062.17 3840,3021.02 3840,2980
"OV D5 PC5": "camera socket.13" U1.45 | length 1118.6
  Top Layer w10: U1.45 3653.28,4124.02 3657.29,4120 v1(3660,4120)
  Bottom Layer w10: v1(3660,4120) 3685,4095 3685,3270 3728.81,3226.19 3728.81,3181.54 3737.01,3173.35
"OV D6 PC6": "camera socket.14" U1.96 | length 2285.5
  Top Layer w10: v1(3945,3650) 3965,3630 3990,3630 4045.28,3574.72 U1.96
  Bottom Layer w10: 3737.01,2950.91 3737.01,2968.14 3721.93,2983.22 3684.03,2983.22 3653.78,3013.47 3520.24,3013.47 3490,2983.23 3490,2905 3546,2849 4124,2849 4170,2895 4170,3013.92 4284,3127.92 4284,3205.69 4210,3279.69 4210,3491.3 4134.54,3566.76 4028.24,3566.76 v1(3945,3650)
"OV D7 PC7": "camera socket.15" U1.97 | length 2297.3
  Top Layer w10: v1(4000,3650) 4064.96,3585.04 U1.97
  Bottom Layer w10: 3637.01,3173.35 3637.01,3065.95 3600.53,3029.47 3513.61,3029.47 3470.75,2986.61 3470.75,2891.41 3529.37,2832.78 4132.78,2832.78 4189.93,2889.93 4189.93,3005.79 4190,3005.86 4190,3011.3 4300,3121.3 4300,3215 4226,3289 4226,3497.93 4134.14,3589.78 4060.22,3589.78 v1(4000,3650)
"OV OE PG15": "camera socket.7" U1.132 | length 1404.2
  Top Layer w10: v1(4230,4075) 4250,4075 4279.72,4045.28 U1.132
  Bottom Layer w10: 4037.01,3173.35 4037.01,3230.62 4019,3248.63 4019,3248.69 3845,3422.69 3845,3910 4010,4075 v1(4230,4075)
"OV RCLK PB4": "camera socket.16" U1.134 | length 2362.8
  Top Layer w10: v1(4230,4180) 4275,4135 4275,4110 4300.35,4084.65 U1.134
  Bottom Layer w10: 3637.01,2950.91 3637.01,2927.28 3679.29,2885 4065,2885 4080,2900 4080,3003.39 3987,3096.39 3987,3235.44 3805,3417.44 3805,3970.08 4014.92,4180 v1(4230,4180)
"OV RRST PG14": "camera socket.5" U1.129 | length 1405.8
  Top Layer w10: v1(4230,4025) 4250,4025 4288.78,3986.22 U1.129
  Bottom Layer w10: 4137.01,3173.35 4137.01,3196.97 4121.93,3212.05 4078.21,3212.05 4035,3255.25 4035,3255.32 3865,3425.32 3865,3875.45 4014.55,4025 v1(4230,4025)
"OV SCL PD3": "camera socket.4" U1.117 | length 1448.2
  Top Layer w10: v1(4180,3650) 4180,3685 4210,3715 4280,3715 4314.65,3749.65 4352.02,3749.65 U1.117
  Bottom Layer w10: v1(4180,3650) 4180,3620 4500,3300 4500,2975 4370,2845 4265,2845 4237.01,2872.99 4237.01,2950.91
"OV SDA PG13": "camera socket.6" U1.128 | length 1636.7
  Top Layer w10: v1(4230,3975) 4232.39,3975 4240.86,3966.54 U1.128
  Bottom Layer w10: 4137.01,2950.91 4137.01,3088.31 4175,3126.3 4175,3475 4120,3530 3985,3530 3885,3630 3885,3850 4010,3975 v1(4230,3975)
"OV VSYNC PA8": "camera socket.17" U1.100 | length 2673.9
  Top Layer w10: U1.100 4124.02,3619.02 4145,3640 4145,3675 4210,3740 v1(4270,3740)
  Bottom Layer w10: 3537.01,3173.35 3537.01,3075.5 3450,2988.49 3450,2889.53 3522.75,2816.78 4371.78,2816.78 4520,2965 4520,3315 4270,3565 v1(4270,3740)
"OV WEN PB3": "camera socket.18" U1.133 | length 2418.5
  Top Layer w10: v1(4230,4125) 4289.69,4065.31 4352.02,4065.31 U1.133
  Bottom Layer w10: 3537.01,2950.91 3537.01,2927.28 3599.29,2865 4075,2865 4100,2890 4100,3006.02 4003,3103.02 4003,3242.07 3825,3420.07 3825,3945 4005,4125 v1(4230,4125)
"OV WRST PD6": "camera socket.3" U1.122 | length 1337.6
  Top Layer w10: v1(4265,3850) 4266.57,3848.43 U1.122
  Bottom Layer w10: 4230,3195 4230,3203.98 ; 4237.01,3173.35 4221.93,3188.43 4221.93,3238.07 4194,3266 4194,3481 4124.24,3550.76 3994.24,3550.76 3905,3640 3905,3825 3930,3850 v1(4265,3850) ; 4241.76,3155.99 4245.1,3159.65
RST: C2.2 R1.2 SW1.1 U1.25 | length 620.8
  Top Layer w8: R1.2 3606.93,4862.6 SW1.1 3606.93,4618.07 3640,4585 3680,4585 3710,4555 3710,4515 3809.06,4415.94 U1.25
"SDIO CMD": MICRO_SD1.3 R10.2 U1.116 | length 1411.4
  Top Layer w8: U1.116 4352.52,3730.16 4434.84,3730.16 v1(4435,3730) ; MICRO_SD1.3 4630.09,4542.87 4630.09,4434.91 v1(4780,4285) 4910.77,4285 R10.2
  Bottom Layer w8: v1(4435,3730) 4510,3730 4531,3751 4531,4171 4680,4320 4745,4320 v1(4780,4285)
"SDIO D0": MICRO_SD1.7 R11.2 U1.98 | length 1743.4
  Top Layer w8: v1(4050,3650) 4084.65,3615.35 U1.98 ; MICRO_SD1.7 4783.76,4542.87 4783.76,4458.76 v1(4780,4455) 4780,4445 4840,4385 R11.2
  Bottom Layer w8: v1(4050,3650) 4190,3790 4455,3790 4500,3835 4500,4184.8 4663.2,4348 4763,4348 4780,4365 v1(4780,4455)
"SDIO D1": MICRO_SD1.8 R12.2 U1.99 | length 1655.7
  Top Layer w8: U1.99 4104.67,3521.99 4104.67,3649.67 v1(4105,3650) ; MICRO_SD1.8 4836.85,4484.51 4855,4466.37 v1(4855,4455) 4866.37,4455 4881.37,4440 R12.2
  Bottom Layer w8: v1(4105,3650) 4107.3,3652.3 4107.3,3662.3 4220,3775 4490,3775 4515,3800 4515,4180 4669,4334 4799,4334 4855,4390 v1(4855,4455)
"SDIO D2": MICRO_SD1.1 R13.2 U1.111 | length 1530.3
  Top Layer w8: U1.111 4398.11,3631.89 4420,3610 v1(4480,3610) ; MICRO_SD1.1 4533.7,4361.3 4735,4160 R13.2
  Bottom Layer w8: v1(4480,3610) 4510,3610 4574,3674 4574,4154.2 4644.8,4225 v1(4675,4225)
"SDIO D3": MICRO_SD1.2 R14.2 U1.112 | length 1448.9
  Top Layer w8: U1.112 4353.09,3650.85 4434.15,3650.85 v1(4435,3650) ; MICRO_SD1.2 4577.01,4392.99 v1(4695,4275) 4737.03,4232.97 4911.07,4232.97 4921.54,4222.5 R14.2
  Bottom Layer w8: v1(4435,3650) 4510,3650 4560,3700 4560,4160 4672.7,4272.7 4692.7,4272.7 v1(4695,4275)
"SDIO SCK": R9.1 U1.113 | length 1308.3
  Top Layer w8: U1.113 4406.26,3671.26 4425,3690 v1(4480,3690) ; R9.1 v1(5035,4330)
  Bottom Layer w8: v1(4480,3690) 4505,3690 4545,3730 4545,4165 4685,4305 4710,4305 4760,4255 4960,4255 v1(5035,4330)
SWCLK: P2.2 R7.1 U1.109 | length 609.8
  Top Layer w8: U1.109 4442.48,3592.52 4550,3485 4765.98,3485 4775.98,3475 P2.2
  Top Layer w12: P2.2 4844.41,3475 4890.47,3521.06 R7.1
SWDIO: P2.1 R6.1 U1.105 | length 797.4
  Top Layer w8: U1.105 4222.44,3577.44 4235,3590 4285,3590 4450,3425 P2.1
  Top Layer w12: P2.1 R6.1
USART2_RX: JP2.1 U1.37 | length 2557.8
  Top Layer w8: U1.37 3573.5,4281.5 v1(3600,4255) ; v1(3560,3270) 3630,3200 4520,3200 4600,3120 4600,3035 4700,2935 4740,2935 JP2.1
  Bottom Layer w8: v1@3560,3270.69 3560,4215 v1(3600,4255)
USART2_TX: JP2.8 U1.36 | length 2295.7
  Top Layer w8: U1.36 3593.25,4351.63 3593.25,4306.75 3640,4260 v1(3640,4205) ; v1(3620,3270) 3665,3225 4560,3225 4640,3305 JP2.8
  Bottom Layer w8: v1(3620,3270) 3620,4075 3585,4110 3585,4175 3615,4205 v1(3640,4205)
VCC: "camera socket.1" C7.2 C8.2 C9.2 C10.2 C11.2 C12.2 C13.2 C14.2 C15.2 C16.2 C17.2 C20.2 C22.1 C23.2 D1.2 JP1.9 JP2.7 MICRO_SD1.4 P1.1 P1.2 P2.4 R1.1 R3.2 R6.2 R10.1 R11.1 R12.1 R13.1 R14.1 R15.1 R16.1 U1.17 U1.39 U1.52 U1.62 U1.72 U1.84 U1.95 U1.108 U1.121 U1.131 U1.144 U2.C U3.3 U3.7 U3.8 U*.5 | length 5785.9
  Top Layer w12: U3.8 2990,3350 3000,3360 3025,3360 3040,3345 U3.7 3040,3160 3090,3110 U3.3 3090,2940 3105,2925 3154.61,2925 C23.2 3210.39,2980 v1(3270,2980) ; v1(3200,4510) 3201.22,4511.22 3201.22,4568.78 R3.2 ; C20.2 3275.06,4862.5 3542.97,4862.5 R1.1 ; v1(3315,4430) 3315,4365 3359.61,4320.39 C17.2 3412.13,4308.27 3426.73,4308.27 3435,4300 3435,4285 3477.87,4242.13 U1.39 ; v1(3345,3580) 3399.61,3580 C14.2 3480.19,3580.39 3492.32,3592.52 U1.72 ; v1(3345,3775) 3347.16,3775 3352.56,3780.39 C9.2 3408.98,3789.37 U1.62 ; v1(3345,3945) 3347.16,3945 3354.86,3952.69 3387.3,3952.69 C15.2 3442.09,3965.39 3462.92,3986.22 U1.52 ; U1.84 3809.06,3430.94 3821.91,3418.09 3821.91,3392.7 C13.2 3844.61,3370 3844.61,3372.28 3847.31,3374.98 3904.98,3374.98 v1(3925.01,3395.01) ; v1(3945,4510) 3946.53,4508.47 3946.53,4503.86 C16.2 3980.39,4435.39 3966.54,4421.54 U1.17 ; U1.95 4025.59,3466.45 4025,3465.86 4025,3440 4054.61,3410.39 C7.2 v1(4125,3380) ; U1.108 4281.5,3453.5 4309.61,3425.39 C11.2 4373.47,3316.14 4373.47,3291.53 v1(4375,3290) ; U1.121 4416.57,3828.74 4427.43,3839.61 C12.2 4510,3874.61 4510,3905 ; U1.131 4425.59,4025.59 4434.61,4034.61 C8.2 ; U1.144 4473.11,4281.5 C10.2 v1(4475,4345) ; v1(4435,4080) 4436.53,4078.47 4436.53,4073.08 C8.2 ; v1(4615,3905) 4510,3905 ; MICRO_SD1.4 4663.62,4458.54 4670,4452.16 v1(4670,4450) ; JP2.7 4871.49,3366.49 4894.95,3366.49 4949.53,3421.06 R6.2 4995,3425 5025,3395 5025,3275 ; R16.1 4955.59,3255 5005,3255 5025,3275 ; R15.1 4994.41,3084.41 5025,3115 5025,3275 ; R10.1 5035,4275 ; R12.1 4995,4440 5015,4420 ; R13.1 5015,4160 5025,4170 5025,4220 ; R14.1 5025,4220 ; R11.1 5002.97,4385 5015,4397.03 5015,4420 ; v1(5025,4500) 5052.97,4472.03 5052.97,4420 ; C8.2 4487.7,4021.91 4503.09,4021.91 4510,4015 4510,3905 ; 5015,4420 5052.97,4420 ; 5025,4220 5035,4230 5035,4275 ; 5035,4275 5060,4300 5060,4412.97 5052.97,4420
  Bottom Layer w12: v1(2935,4570) D1.2 ; 4337.01,3173.35 4337.01,3149.72 4382.13,3104.61 C22.1 4440,3225 v1(4375,3290) ; v1(4615,3905) 4615,3963.92 U2.C
  other v1: 3415,4865
VDDA: C3.1 C4.1 R3.1 U1.32 U1.33 | length 640.9
  Top Layer w8: R3.1 3540.79,4570 C4.1 3585,4524.21 C3.1 3585,4440 3595,4430 3630,4430 3651.57,4408.43 ; U1.33 3651.57,4408.43 ; U1.32 3671.26,4403.74 3666.57,4408.43 3651.57,4408.43
pads on no net: "camera socket.MH1" "camera socket.MH2" JP1.1 JP2.4 JP2.6 MICRO_SD1. SW1.H1 U1.1 U1.2 U1.3 U1.4 U1.5 U1.7 U1.10 U1.11 U1.12 U1.13 U1.14 U1.15 U1.18 U1.19 U1.20 U1.21 U1.22 U1.34 U1.49 U1.50 U1.53 U1.54 U1.55 U1.56 U1.57 U1.58 U1.59 U1.60 U1.63 U1.64 U1.65 U1.66 U1.67 U1.68 U1.69 U1.70 U1.77 U1.78 U1.79 U1.80 U1.81 U1.82 U1.85 U1.86 U1.87 U1.88 U1.89 U1.90 U1.91 U1.92 U1.93 U1.101 U1.102 U1.103 U1.104 U1.106 U1.110 U1.114 U1.115 U1.118 U1.119 U1.123 U1.124 U1.125 U1.126 U1.127 U1.135 U1.139 U1.140 U1.141 U1.142 U2.1 U2.2 U2.3 U2.4 U2.5 U2.6 U*.4
copper on no net:
  other v2: 4985,2890 2900,4980

## Polygon pours and split planes (outlines as drawn)
GND on GND (split plane): 5056.48,5095.76 5067.15,5091.34 5076.75,5084.92 5084.92,5076.75 5091.34,5067.15 5095.76,5056.48 5098.01,5045.15 5098.01,5039.37 5098.01,2834.65 5098.01,2828.87 5095.76,2817.54 5091.34,2806.87 5084.92,2797.26 5076.75,2789.09 5067.15,2782.68 5056.48,2778.26 5045.15,2776 2828.87,2776 2817.54,2778.26 2806.87,2782.68 2797.26,2789.09 2789.09,2797.26 2782.68,2806.87 2778.26,2817.54 2776,2828.87 2776,2834.65 2776,5039.37 2776,5045.15 2778.26,5056.48 2782.68,5067.15 2789.09,5076.75 2797.26,5084.92 2806.87,5091.34 2817.54,5095.76 2828.87,5098.01 5045.15,5098.01
VCC on PWR (split plane): 5056.48,5095.76 5067.15,5091.34 5076.75,5084.92 5084.92,5076.75 5091.34,5067.15 5095.76,5056.48 5098.01,5045.15 5098.01,5039.37 5098.01,2834.65 5098.01,2828.87 5095.76,2817.54 5091.34,2806.87 5084.92,2797.26 5076.75,2789.09 5067.15,2782.68 5056.48,2778.26 5045.15,2776 2828.87,2776 2817.54,2778.26 2806.87,2782.68 2797.26,2789.09 2789.09,2797.26 2782.68,2806.87 2778.26,2817.54 2776,2828.87 2776,2834.65 2776,5039.37 2776,5045.15 2778.26,5056.48 2782.68,5067.15 2789.09,5076.75 2797.26,5084.92 2806.87,5091.34 2817.54,5095.76 2828.87,5098.01 5045.15,5098.01

## Other copper
Top Layer:
  rectangle net VCC: 3185,4845 3295,4880
  rectangle net VCC: 3185,4830 3240,4880
  rectangle net GND: 3075,4790 3295,4820
  rectangle net NetC21_1: 3020,4745 3125,4780
  rectangle net NetC21_1: 3020,4745 3050,4865
  rectangle net NetC21_1: 3020,4830 3125,4865

## Silkscreen, mask and mechanical layers (free items; w line width, h text height)
Mechanical 1:
  the board outline again, w10

## Text inside footprints (layer, text, board x,y; h text height)
JP2: Top Overlay "8" at 4730,3370 h15 r90; Top Overlay "1" at 4825,2920 h15 r90; Top Overlay "2" at 4720,2915 h15 r90; Top Overlay "7" at 4830,3370 h15 r90